# Altium PCB PCB1.PcbDoc
Units mm, origin at the board's own origin, x right, y up, seen from the top; angles counter-clockwise.
Board outline 80 x 100 mm, 2 copper layers (Top Layer, Bottom Layer), stack 1.534 mm thick; 74 components, 57 nets, 283 pads, 92 vias.
Unrouted connection lines stored in the file: 1.
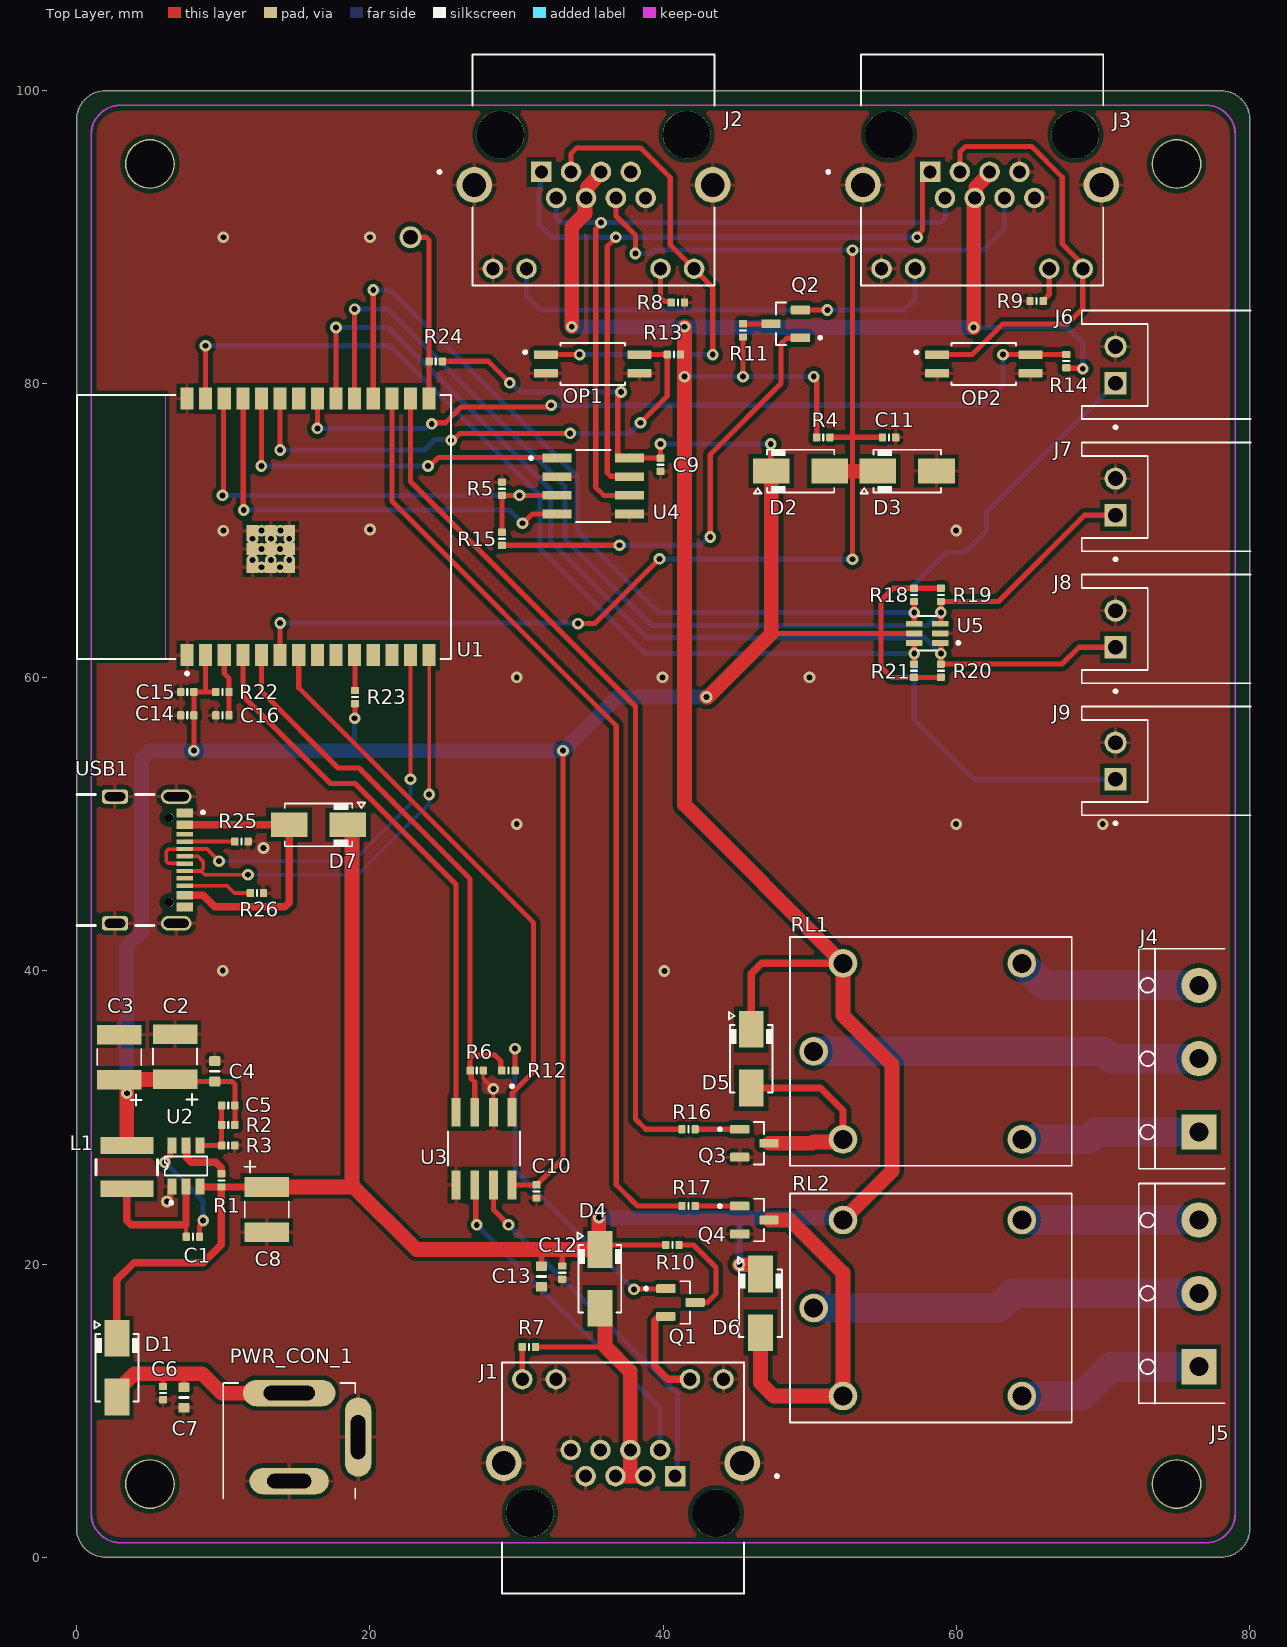
[diagram p0: Top Layer view]
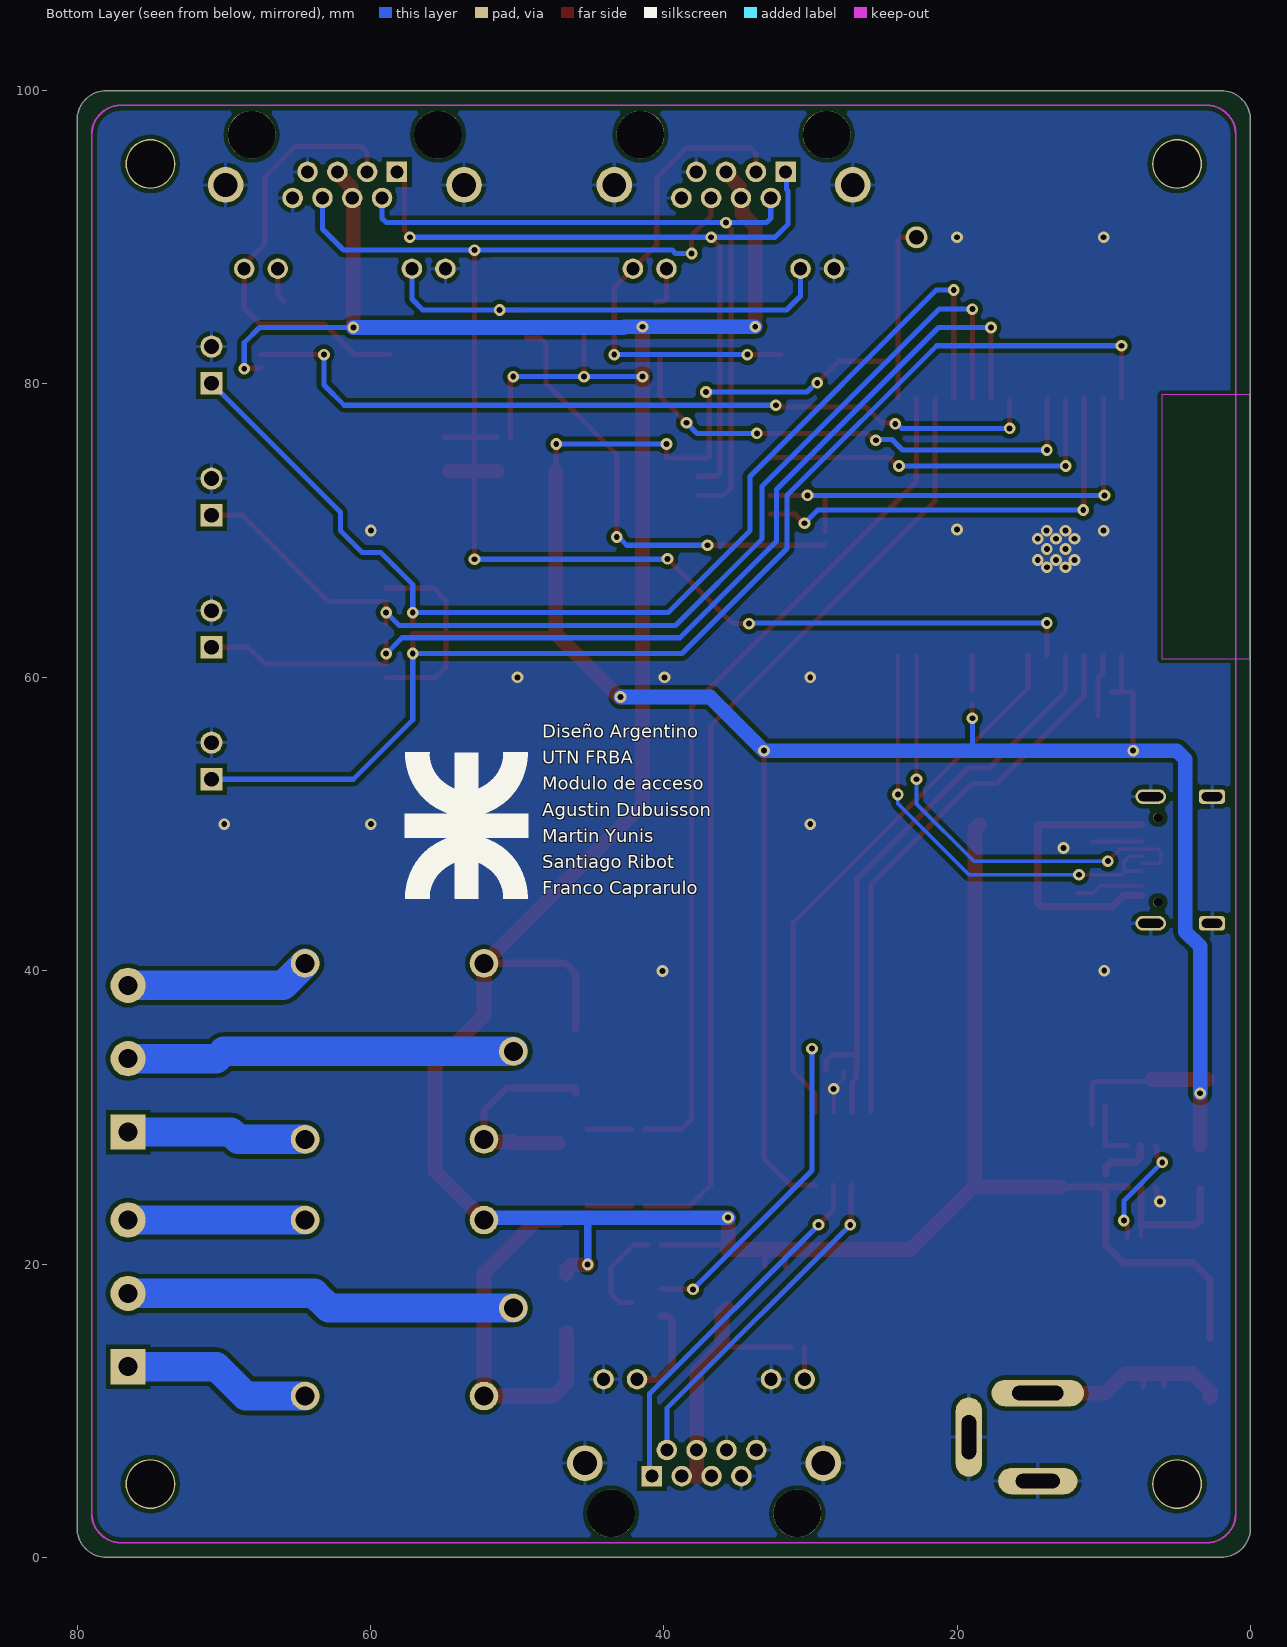
[diagram p1: Bottom Layer view, seen from below]
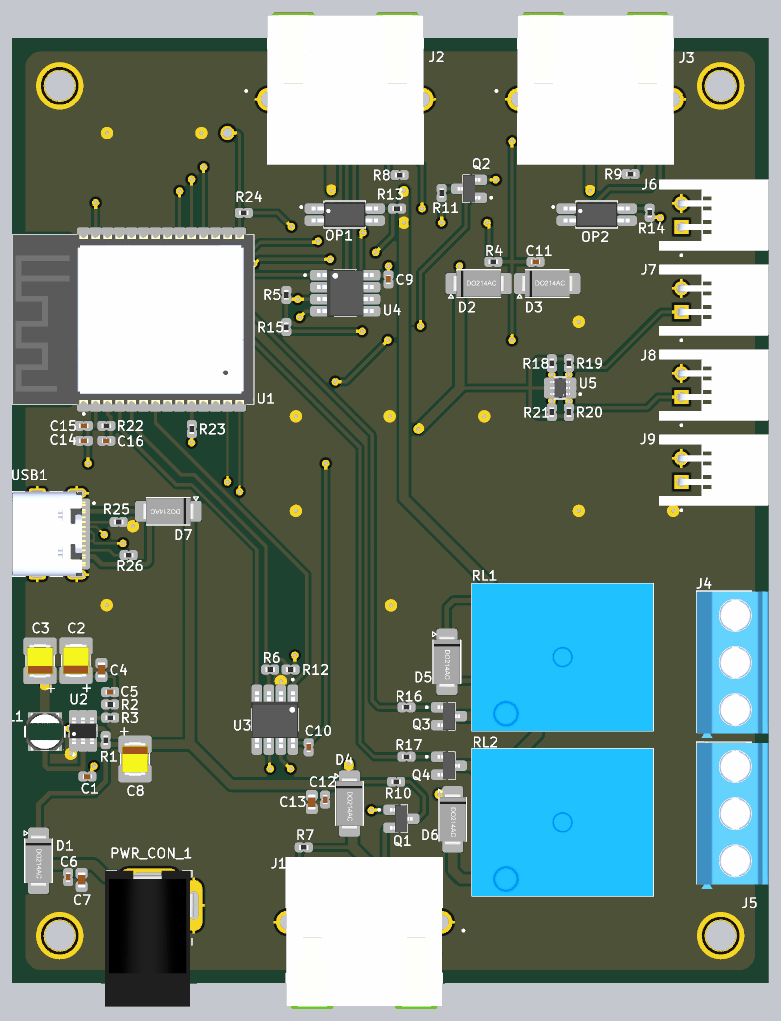
[diagram p2: 3D render of the assembled board from above, using the file's embedded part models]

## Layer stack, top to bottom
Top Solder: solder mask 0.0127, Solder Resist, Dk 3.3
Top Layer: signal copper 0.0178
Dielectric1: core 1.4986, FR-4, Dk 4.3
Bottom Layer: signal copper 0.0178
Bottom Solder: solder mask 0.0127, Solder Resist, Dk 3.3

## Board outline
0,2 0,98 cw(c2,98) 2,100 78,100 cw(c78,98) 80,98 80,2 cw(c78,2) 78,0 2,0 cw(c2,2)

## Design rules (kind name [scope] priority, off if disabled: settings)
Clearance [All] p1: gap=0.3 ignorepadtopadclearanceinfootprint=FALSE
DiffPairsRouting [All] p1: maxlimit=0.254 minlimit=0.254 mostfreqgap=0.254 toplayer_minwidth=0.254 toplayer_maxwidth=0.254 toplayer_prefwidth=0.254 bottomlayer_minwidth=0.254 bottomlayer_maxwidth=0.254 bottomlayer_prefwidth=0.254 maxuncoupledlength=12.7
HoleSize [All] p1: absolutevalues=TRUE maxlimit=7.62 minlimit=0.254 maxpercent=80.000 minpercent=20.000
MinimumAnnularRing [All] p1: minimumring=0.254
PasteMaskExpansion [All] p1: expansion=0.254
PlaneClearance [All] p1: clearance=0.381
PlaneConnect [All] p1: pad.planeconnectstyle=Relief pad.reliefexpansion=0.508 pad.reliefentries=4 pad.reliefconductorwidth=0.254 pad.reliefairgap=0.254 via.planeconnectstyle=Direct via.reliefexpansion=0.508 via.reliefentries=4 via.reliefconductorwidth=0.254 via.reliefairgap=0.254
PolygonConnect Polygon_GND [All] p1: thpad.connectstyle=Relief thpad.reliefconductorwidth=0.254 thpad.reliefentries=4 thpad.polygonreliefangle="90 Angle" thpad.airgapwidth=0.3 smdpad.connectstyle=Relief smdpad.reliefconductorwidth=0.254 smdpad.reliefentries=4 smdpad.polygonreliefangle="90 Angle" smdpad.airgapwidth=0.254 via.connectstyle=Direct via.reliefconductorwidth=0.254 via.reliefentries=4 via.polygonreliefangle="90 Angle" via.airgapwidth=0.254
PolygonConnect Polygon_GND_PWR [All] p2: thpad.connectstyle=Relief thpad.reliefconductorwidth=0.254 thpad.reliefentries=4 thpad.polygonreliefangle="90 Angle" thpad.airgapwidth=0.254 smdpad.connectstyle=Relief smdpad.reliefconductorwidth=0.254 smdpad.reliefentries=4 smdpad.polygonreliefangle="90 Angle" smdpad.airgapwidth=0.254 via.connectstyle=Direct via.reliefconductorwidth=0.254 via.reliefentries=4 via.polygonreliefangle="90 Angle" via.airgapwidth=0.254
PolygonConnect Polygon_PWR [All] p3: thpad.connectstyle=Relief thpad.reliefconductorwidth=0.254 thpad.reliefentries=4 thpad.polygonreliefangle="90 Angle" thpad.airgapwidth=0.254 smdpad.connectstyle=Relief smdpad.reliefconductorwidth=0.254 smdpad.reliefentries=4 smdpad.polygonreliefangle="90 Angle" smdpad.airgapwidth=0.254 via.connectstyle=Direct via.reliefconductorwidth=0.254 via.reliefentries=4 via.polygonreliefangle="90 Angle" via.airgapwidth=0.254
RoutingVias [All] p1: holewidth=0.254 width=0.508 viastyle="Through Hole" minholewidth=0.254 minwidth=0.508 maxholewidth=0.254 maxwidth=0.508
SMDNeckDown [All] p1: percent=100.000
SilkToSolderMaskClearance SilkscreenOverComponentPads [IsPad] p1: minsilkscreentomaskgap=0.254 clearancetoexposedcopper=TRUE
SolderMaskExpansion [All] p1: expansion=0.254 istentingtop=FALSE
SupplyNets "Schematic Supply Nets_5" [InNet('VBus')] p1: voltage=0.000
SupplyNets "Schematic Supply Nets_4" [InNet('BUS_PWR_IN')] p2: voltage=0.000
SupplyNets "Schematic Supply Nets_3" [InNet('GND')] p3: voltage=0.000
SupplyNets "Schematic Supply Nets_2" [InNet('+3.3V')] p4: voltage=0.000
SupplyNets "Schematic Supply Nets_1" [InNet('+12V')] p5: voltage=0.000
SupplyNets "Schematic Supply Nets" [InNet('PWR_IN')] p6: voltage=0.000
Width [All] p1: maxlimit=5 minlimit=0.254 preferedwidth=0.35 minimp=50.000000 maximp=50.000000 favimp=50.000000
24 further rules are at their usual default settings.

## Classes and differential pairs
component class MdA_RS485: C9 C10 C11 C12 C13 D2 D3 D4 J1 J2 J3 OP1 OP2 Q1 Q2 R4 R5 R6 R7 R8 R9 R10 R11 R12 R13 R14 R15 U3 U4
component class MdA_Power: C1 C2 C3 C4 C5 C6 C7 C8 D1 L1 PWR_CON_1 R1 R2 R3 U2
component class MdA_Perifericos: D5 D6 J4 J5 J6 J7 J8 J9 Q3 Q4 R16 R17 R18 R19 R20 R21 RL1 RL2 U5
component class MdA_CPU: C14 C15 C16 D7 R22 R23 R24 R25 R26 U1 USB1

## Components (designator, comment, footprint, x,y, rotation, side; value= is the part's Value field where it differs from the comment)
C1 "CAP" C_0402 7.932,21.86 r90 top
C2 "CAP_P" C_P_1210 6.72,34.133 r90 top
C3 "CAP_P" C_P_1210 2.916,34.1 r90 top
C4 "CAP" C_0603 9.421,33.142 r180 top
C5 "CAP" C_0402 10.346,30.798 r90 top
C6 "CAP" C_0402 5.9,11.2 r180 top
C7 "CAP" C_0603 7.317,10.9 r180 top
C8 "CAP_P" C_P_1210 12.971,23.71 r270 top
C9 "CAP" C_0402 39.817,74.497 r180 top
C10 "CAP" C_0402 31.367,24.948 r180 top
C11 "CAP" C_0402 55.395,76.365 r270 top
C12 "CAP" C_0402 33.114,19.412 r180 top
C13 "CAP" C_0603 31.692,19.148 r180 top
C14 "CAP" C_0402 7.55,57.412 r90 top
C15 "CAP" C_0402 7.55,59 r90 top
C16 "CAP" C_0402 9.946,57.412 r90 top
D1 "SS14" D_SMA#1 2.8,12.941 r0 top
D2 "SS14" D_SMA#1 49.355,74.105 r90 top
D3 "SS14" D_SMA#1 56.617,74.105 r90 top
D4 "SS14" D_SMA#1 35.726,19 r0 top
D5 "SS14" D_SMA#1 46.047,34.008 r0 top
D6 "SS14" D_SMA#1 46.673,17.331 r0 top
D7 "SS14" D_SMA#2 16.5,49.947 r0 top
J1 "RJ45-8-Pin-2-LED" RJ45-8-Pin-2-Led 37.123,2.365 r0 top locked
J2 "RJ45-8-Pin-2-LED" RJ45-8-Pin-2-Led 35.372,97.635 r180 top locked
J3 "RJ45-8-Pin-2-LED" RJ45-8-Pin-2-Led 61.872,97.635 r180 top locked
J4 "CONN_3P" BORNERA_3P_P_5mm 76.524,34.01 r0 top locked
J5 "CONN_3P" BORNERA_3P_P_5mm 76.524,18.01 r0 top locked
J6 "JST_S2B_XH-A" JST_S2B-XH-A 75.9,81.3 r90 top locked
J7 "JST_S2B_XH-A" JST_S2B-XH-A 75.9,72.3 r90 top locked
J8 "JST_S2B_XH-A" JST_S2B-XH-A 75.9,63.3 r90 top locked
J9 "JST_S2B_XH-A" JST_S2B-XH-A 75.9,54.3 r90 top locked
L1 "IND" IFSC1515AH 3.371,26.661 r180 top
OP1 "TCMT1100" SSOP4 35.185,81.238 r0 top
OP2 "TCMT1100" SSOP4 61.862,81.238 r0 top
PWR_CON_1 "CN_PowerJack" PJ002B 14.5,5.2 r0 top locked
Q1 "BC817" SOT-23-3 41.175,17.379 r0 top
Q2 "BC817" SOT-23-3 48.35,84.1 r180 top
Q3 "BC817" SOT-23-3 46.215,28.237 r0 top
Q4 "BC817" SOT-23-3 46.215,23 r0 top
R1 "RES" R_0402 9.871,25.7 r180 top
R2 "RES" R_0402 10.346,29.486 r270 top
R3 "RES" R_0402 10.346,28.082 r90 top
R4 "RES" R_0402 50.913,76.365 r270 top
R5 "RES" R_0402 29,72.857 r0 top
R6 "RES" R_0402 27.288,33.185 r270 top
R7 "RES" R_0402 30.842,14.348 r270 top
R8 "RES" R_0402 41,85.55 r270 top
R9 "RES" R_0402 65.45,85.652 r90 top
R10 "RES" R_0402 40.625,21.3 r270 top
R11 "RES" R_0402 45.444,83.65 r0 top
R12 "RES" R_0402 29.45,33.185 r90 top
R13 "RES" R_0402 40.725,82 r90 top
R14 "RES" R_0402 67.477,81.56 r0 top
R15 "RES" R_0402 29,69.45 r0 top
R16 "RES" R_0402 41.725,29.187 r270 top
R17 "RES" R_0402 41.725,23.95 r270 top
R18 "RES" R_0402 57.11,65.621 r180 top
R19 "RES" R_0402 58.925,65.621 r180 top
R20 "RES" R_0402 58.925,60.45 r0 top
R21 "RES" R_0402 57.11,60.45 r0 top
R22 "RES" R_0402 9.946,59 r270 top
R23 "RES" R_0402 18.988,58.653 r180 top
R24 "RES" R_0402 24.49,81.547 r270 top
R25 "RES" R_0402 11.246,48.804 r90 top
R26 "RES" R_0402 12.3,45.295 r90 top
RL1 "SRD-24VDC-SL-C" RELAY_SRD-24VDC-SL-C 58,34.119 r0 top locked
RL2 "SRD-24VDC-SL-C" RELAY_SRD-24VDC-SL-C 58,16.619 r0 top locked
U1 "ESP32-C6-WROOM-1" ESP32-C6-WROOM-1 12.79,70.128 r90 top
U2 "TPS563200" SOT-23-6 7.377,26.684 r0 top
U3 "ISL3172EIBZ" SOIC-8 27.657,27.873 r270 top
U4 "ISL3172EIBZ" SOIC-8 35.233,72.915 r0 top
U5 "NUP4202" SOT-363 58,62.999 r180 top
USB1 "USB-Type-C-16-pins" GCT_USB4105GFA120 2.7,47.7 r270 top locked

## Footprints (in the part's own frame and the unit in brackets; to place one, negate y for a bottom-side part, rotate by r counter-clockwise, add the part's x,y. Pads: shape width x height; smd on the part's side, far side on the other; paste and mask are expansions set on the pad)
BORNERA_3P_P_5mm [mm]
  rect 2.4x2.4 hole 1.3: 1(-0.002,-5.01)
  round 2.4 hole 1.3: 2(-0.002,-0.01) 3(-0.002,4.99)
  silkscreen extent -4.1,-7.51 1.75,7.49, body extent -4.08,-8.09 3.52,7.41, height 10
C_0402 [mm]
  rrect25% 0.55x0.5 smd: 1(0,-0.45) 2(0,0.45)
  silkscreen extent -0.2,0 0.2,0, body extent -0.25,-0.5 0.25,0.5, height 0.6
C_0603 [mm]
  rrect25% 0.76x0.66 smd: 1(0,-0.7) 2(0,0.7)
  silkscreen extent -0.3,0 0.3,0, body extent -0.4,-0.8 0.4,0.8, height 0.95
C_P_1210 [mm]
  rect 1.34x3.02 smd: 1(-1.54,0) 2(1.54,0)
  silkscreen extent -3.3,-1.52 0.55,1.5, body extent -1.75,-1.4 1.75,1.4, height 2.1
D_SMA#1 [mm]
  rect 1.7x2.5 smd: 1(-0.047,-2.008) 2(-0.047,1.992)
  silkscreen extent -1.57,-2.31 1.48,3.17, body extent -1.44,-2.75 1.35,2.74, height 2.39
D_SMA#2 [mm]
  rect 2.5x1.7 smd: 1(-2,0) 2(2,0)
  silkscreen extent -2.3,-1.52 3.17,1.52, body extent -2.74,-1.4 2.74,1.4, height 2.39
ESP32-C6-WROOM-1 [mm]
  rect 1.5x0.9 smd: 1(-8.623,5.26) 2(-8.623,3.99) 3(-8.623,2.72) 4(-8.623,1.45) 5(-8.623,0.18) 6(-8.623,-1.09) 7(-8.623,-2.36) 8(-8.623,-3.63) 9(-8.623,-4.9) 10(-8.623,-6.17) 11(-8.623,-7.44) 12(-8.623,-8.71) 13(-8.623,-9.98) 14(-8.623,-11.25) 15(8.877,-11.25) 16(8.877,-9.98) 17(8.877,-8.71) 18(8.877,-7.44) 19(8.877,-6.17) 20(8.877,-4.9) 21(8.877,-3.63) 22(8.877,-2.36) 23(8.877,-1.09) 24(8.877,0.18) 25(8.877,1.45) 26(8.877,2.72) 27(8.877,3.99) 28(8.877,5.26)
  rect 0.8x0.8 smd: 29_1(-2.628,0.79) 29_2(-1.378,0.79) 29_3(-0.128,0.79) 29_4(-2.628,-0.46) 29_5(-1.378,-0.46) 29_6(-0.128,-0.46) 29_7(-2.628,-1.71) 29_8(-1.378,-1.71) 29_9(-0.128,-1.71)
  Keep-Out Layer region: 9.127,6.75 -8.873,6.75 -8.873,12.75 9.127,12.75
  silkscreen extent -9.97,-12.75 9.13,12.75, body extent -8.87,-12.75 9.13,12.75, height 3.25
GCT_USB4105GFA120 [mm]
  rect 0.6x1.15 smd: A1_B12(-3.047,4.676) A4_B9(-2.247,4.676) B1_A12(3.353,4.676) B4_A9(2.553,4.676)
  rect 0.3x1.15 smd: A5(-1.097,4.676) A6(-0.097,4.676) A7(0.403,4.676) A8(1.403,4.676) B5(1.903,4.676) B6(0.903,4.676) B7(-0.597,4.676) B8(-1.597,4.676)
  oval 1x2.1 hole 0.6 slot 1.7 at 90 deg: SH1(-4.167,4.101) SH2(4.473,4.101)
  rrect50% 1x1.8 hole 0.6 slot 1.4 at 90 deg: SH3(-4.167,-0.079) SH4(4.473,-0.079)
  round 0.65 hole 0.65 unplated: ""(-2.737,3.601) ""(3.043,3.601)
  silkscreen extent -4.32,-2.68 4.62,6.02, body extent -4.32,-2.68 4.62,5.03, height 3.31
IFSC1515AH [mm]
  rect 3.6x1.15 smd paste+0 mask+0: 1(-0.061,1.529) 2(-0.061,-1.421)
  silkscreen extent -2.16,-0.47 2.04,0.58, body extent -2.06,-1.95 1.94,2.05, height 1.9
JST_S2B-XH-A [mm]
  rect 1.508x1.508 / inner round 1.508 / far side rect 1.508x1.508 hole 1: 1(-1.25,5.065)
  round 1.508 hole 1: 2(1.25,5.065)
  silkscreen extent -4.35,-4.14 3.7,7.36, body extent -3.7,-4.14 3.7,7.36, height 6.1
PJ002B [mm]
  oval 6.3x1.8 hole 1 slot 3.5 at 0 deg: 1(0,6)
  oval 5.4x1.8 hole 1 slot 3 at 0 deg: 2(0,0)
  oval 1.8x5.4 hole 1 slot 3 at 90 deg: 3(4.7,3)
  silkscreen extent -4.5,-1.2 4.5,6.7, body extent -4.7,-7.7 4.7,6.7, height 11.05
R_0402 [mm]
  rrect25% 0.55x0.5 smd: 1(0,-0.45) 2(0,0.45)
  silkscreen extent -0.2,0 0.2,0, body extent -0.25,-0.5 0.25,0.5, height 0.3
RELAY_SRD-24VDC-SL-C [mm]
  round 1.95 hole 1.3: COIL1(-5.746,6.381) COIL2(-5.746,-5.619) COM(-7.746,0.381) NC(6.454,6.381) NO(6.454,-5.619)
  silkscreen extent -9.35,-7.42 9.85,8.18, body extent -9.35,-7.42 9.85,8.18, height 15.8
RJ45-8-Pin-2-Led [mm]
  rect 1.398x1.398 / inner round 1.398 / far side rect 1.398x1.398 hole 0.89: 1(3.683,3.175)
  round 1.398 hole 0.89: 2(2.667,4.953) 3(1.651,3.175) 4(0.635,4.953) 5(-0.381,3.175) 6(-1.397,4.953) 7(-2.413,3.175) 8(-3.429,4.953) 9(6.985,9.779) 10(4.699,9.779) 11(-4.445,9.779) 12(-6.731,9.779)
  round 2.43 hole 1.62: SH1(-8.001,4.064) SH2(8.255,4.064)
  round 3.25 hole 3.25 unplated: ""(-6.223,0.635) ""(6.477,0.635)
  silkscreen extent -8.13,-4.82 10.73,10.92, body extent -8.13,-5.13 8.38,10.92, height 15.5
SOIC-8 [mm]
  rect 1.97x0.6 smd: 1(-2.475,2.032) 2(-2.475,0.762) 3(-2.475,-0.508) 4(-2.475,-1.778) 5(2.475,-1.778) 6(2.475,-0.508) 7(2.475,0.762) 8(2.475,2.032)
  silkscreen extent -4.35,-2.32 1.17,2.58, body extent -3,-2.32 3,2.58, height 1.75
SOT-23-3 [mm]
  rrect25% 1.32x0.6 smd: 1(-1,0.95) 2(-1,-0.95) 3(1,0)
  silkscreen extent -2.45,-1.45 0.65,1.45, body extent -1.2,-1.45 1.2,1.45, height 1.2
SOT-23-6 [mm]
  rect 0.6x1.1 smd: 1(-0.867,-1.402) 2(0.083,-1.402) 3(1.033,-1.402) 4(1.033,1.398) 5(0.083,1.398) 6(-0.867,1.398)
  silkscreen extent -1.37,-2.6 1.53,0.65, body extent -1.37,-1.4 1.53,1.4, height 1.45
SOT-363 [mm]
  rrect25% 1.15x0.4 smd: 1(-0.89,0.65) 2(-0.89,0) 3(-0.89,-0.65) 4(0.89,-0.65) 5(0.89,0) 6(0.89,0.65)
  silkscreen extent -2.22,-1.17 0.63,1.17, body extent -1.05,-1 1.05,1, height 1.1
SSOP4 [mm]
  rrect25% 1.64x0.59 smd: 1(-3.185,0.762) 2(-3.185,-0.508) 3(3.185,-0.508) 4(3.185,0.762)
  silkscreen extent -4.7,-1.3 2.2,1.56, body extent -3.5,-1.17 3.5,1.43, height 2.1

## Part data
D1 D2 D3 D4 D5 D6: library part DIODE_SH
D7: library part DIODO_SH, "Diode Shottky"
U3 U4: "Transceiver Half RS422, RS485 8-SOIC"

## Free pads (board coordinates)
  round 3.4 hole 3.2 mask+0.8: 9(5,5) 9(5,95) 9(75,5) 9(75,95)
  round 1.5 hole 1: 10(22.77,90)

## Via types
v1: diameter 0.8, hole 0.4, Top Layer to Bottom Layer, 92 vias

## Nets (pads, with @x,y where several pads share a name; then routed paths per layer and width w, separated by ;. In a path a pad name is that pad's centre, name@x,y a point inside that pad or via, vN(x,y) a via of type N, cw(c..) or ccw(c..) an arc to the next point about the centre after c; other vN are vias at no path point)
+3.3V: C2.1 C3.1 C4.2 C5.1 C9.1 C10.1 C14.1 C15.1 D2.2 L1.2 R2.2 R18.1 R19.1 R20.1 R21.1 R22.1 R23.2 R24.2 U1.2 U3.8 U4.8 U5.5 | length 193.4
  Top Layer w0.35: C2.1 6.871,32.442 C4.2 10.591,32.442 10.796,32.237 C5.1 R2.2 ; v1(8,55) C14.1 C15.1 8.748,59 ; U1.2 8.8,59.052 8.748,59 ; R22.1 8.748,59 ; v1(18.96,57.212) 18.974,57.226 18.974,58.189 R23.2 ; R24.2 28.073,81.547 v1@29.54,80.08 ; U3.8 C10.1 31.392,25.398 31.467,25.473 31.467,25.498 33.167,27.198 v1(33.167,55) ; v1(37.114,79.457) 36.898,79.241 36.898,75.072 37.023,74.947 U4.8 C9.1 v1(39.817,75.915) ; v1(47.334,75.915) 47.334,74.087 D2.2 ; 47.363,62.966 47.396,62.999 54.845,62.999 ; 47.363,66.1 47.392,66.071 ; U5.5 54.845,62.999 ; R20.1 R21.1 55.57,60 54.845,60.725 54.845,62.999 ; R19.1 R18.1 55.67,66.071 54.845,65.246 54.845,62.999
  Top Layer w1: C3.1 2.933,32.577 6.704,32.577 C2.1 ; C3.1@3.262,32.56 3.432,32.39 v1(3.432,31.642) L1.2 ; v1(42.943,58.653) 43.05,58.653 47.396,62.999 ; 47.363,62.966 47.363,66.1 D2.2
  Bottom Layer w0.35: 18.96,55 v1(18.96,57.212) ; v1(29.538,80.077) 29.606,80.077 30.226,79.457 v1(37.114,79.457) ; v1(39.817,75.915) v1(47.334,75.915)
  Bottom Layer w1: v1(3.432,31.642) 3.432,41.653 4.44,42.662 4.44,54.414 5.026,55 v1(8,55) 18.96,55 v1(33.167,55) 36.82,58.653 v1(42.943,58.653)
+12V: C8.1 C12.1 C13.1 D1.2 D4.2 D5.2 D6.2 D7.2 J2.4 J2.5 J3.4 J3.5 R1.2 R4.1 R10.1 R11.1 R13.1 R14.1 RL1.COIL1 RL2.COIL1 U2.3 | length 255.7
  Top Layer w0.35: C13.1 31.692,20.992 ; C12.1 33.114,20.992 ; D4.2 35.987,21.3 R10.1 ; v1(45.444,80.5) R11.1 ; v1(50.26,80.5) 50.26,80.378 50.463,80.175 R4.1 ; R14.1 67.514,81.073 68.565,81.073 v1(68.603,81.035)
  Top Layer w0.5: D1.2 2.753,18.92 3.916,20.083 8.63,20.083 9.871,21.323 R1.2 ; U2.3 8.443,25.25 R1.2 ; C8.1 R1.2 ; D5.2 46,39.8 46.7,40.5 RL1.COIL1
  Top Layer w1: C8.1 18.915,25.25 ; D7.2 18.783,49.664 18.783,25.382 18.915,25.25 ; v1(33.763,83.901) 33.763,90.707 34.661,91.605 34.661,92.606 J2.4 34.813,92.758 34.813,93.412 35.753,94.352 J2.5 ; v1(35.614,23.16) 35.614,21.057 D4.2 33.114,20.992 31.692,20.992 23.173,20.992 18.915,25.25 ; v1(41.45,83.901) v1(41.45,80.5) 41.45,51.304 RL1.COIL1 52.254,36.946 55.6,33.6 55.6,26.346 RL2.COIL1 ; v1(45.19,19.962) 46.276,19.962 46.626,19.612 D6.2 ; v1(61.162,83.85) 61.162,92.607 J3.4 61.313,92.758 61.313,93.412 62.253,94.352 J3.5
  Bottom Layer w0.35: v1(41.45,80.5) v1(45.444,80.5) v1(50.26,80.5) ; v1(61.162,83.85) 67.56,83.85 68.603,82.807 v1(68.603,81.035)
  Bottom Layer w0.5: v1(45.19,19.962) 45.19,23.16
  Bottom Layer w1: v1(33.763,83.901) v1(41.45,83.901) 42.699,83.901 42.749,83.85 v1(61.162,83.85) ; v1(35.614,23.16) 45.19,23.16 52.094,23.16 RL2.COIL1
AM_RS485_A: J2.1 J3.1 U4.7 | length 52.6
  Top Layer w0.35: v1(36.769,90) 36.769,89.982 36.183,89.397 36.183,73.927 36.403,73.707 37.678,73.707 U4.7 ; v1(57.31,90) 57.31,90.122 57.665,90.477 57.665,93.936 J3.1
  Bottom Layer w0.35: J2.1 31.63,94.401 31.63,93.267 31.531,93.168 31.531,90.883 32.414,90 v1(57.31,90)
AM_RS485_B: J2.2 J3.2 U4.6 | length 50.3
  Top Layer w0.35: v1(35.753,91) 35.753,90.923 35.4,90.57 35.4,72.951 35.944,72.407 U4.6
  Bottom Layer w0.35: J2.2 32.705,91.28 32.985,91 v1(35.753,91) 58.925,91 59.205,91.28 J3.2
AM_RX: U1.24 U4.1 | length 25
  Top Layer w0.35: v1(12.6,74.4) 12.605,74.405 12.605,78.97 U1.24@12.61,78.975 ; v1(23.965,74.4) 24.079,74.4 24.676,74.997 32.708,74.997 U4.1
  Bottom Layer w0.35: v1(12.6,74.4) v1(23.965,74.4)
AM_TX: U1.25 U4.4 | length 29.6
  Top Layer w0.35: U1.25 11.37,78.975 11.37,71.43 v1(11.4,71.4) ; v1(30.4,70.5) 30.434,70.5 31.071,71.137 U4.4
  Bottom Layer w0.35: v1(11.4,71.4) 29.5,71.4 v1(30.4,70.5)
AM_TX_EN: R5.1 R15.2 U1.26 U4.3 | length 34.3
  Top Layer w0.35: v1(9.946,72.407) 10.008,72.469 10.008,78.943 U1.26 ; R15.2 29,72.332 29.075,72.407 v1(30.2,72.407) ; R5.1 v1(30.2,72.407) ; U4.3 v1(30.2,72.407)
  Bottom Layer w0.35: v1(9.946,72.407) v1(30.2,72.407)
BUS_PWR_IN: D4.1 J1.3 J1.4 J1.5 R7.2 | length 19.1
  Top Layer w0.35: R7.2 35.978,14.348 36.029,14.399
  Top Layer w1: D4.1 36.029,16.642 36.029,14.399 37.758,12.67 J1.4 37.758,5.54 ; J1.5 37.758,5.54 ; J1.3 37.758,5.54
CC1: R25.2 USB1.A5 | length 3.4
  Top Layer w0.254: USB1.A5 7.379,48.801 10.792,48.801 R25.2
CC2: R26.2 USB1.B5 | length 4.7
  Top Layer w0.254: USB1.B5 10.256,45.797 10.758,45.295 R26.2
CM_RS485_A: J1.1 U3.7 | length 25.1
  Top Layer w0.35: U3.7 28.419,23.701 v1(29.45,22.669)
  Bottom Layer w0.35: v1(29.45,22.669) 40.964,11.155 40.964,5.698 J1.1
CM_RS485_B: J1.2 U3.6 | length 23.3
  Top Layer w0.35: U3.6 27.218,25.328 27.218,22.739 v1(27.288,22.669)
  Bottom Layer w0.35: v1(27.288,22.669) 39.79,10.167 J1.2
CM_RX: U1.7 U3.1 | length 38.4
  Top Layer w0.35: U1.7 15.15,59.285 31.167,43.268 31.167,33.117 29.703,31.653 29.703,30.362 U3.1
CM_TX: U1.4 U3.4 | length 38.2
  Top Layer w0.35: U1.4 11.34,58.731 17.312,52.759 18.988,52.759 25.879,45.868 U3.4
CM_TX_EN: R6.1 R12.2 U1.5 U3.3 | length 41.1
  Top Layer w0.35: U1.5 12.61,59.045 17.828,53.827 19.263,53.827 26.838,46.252 26.838,34.049 ; U3.3 27.149,32.39 26.913,32.626 26.913,33.11 R6.1 26.838,34.049 ; R12.2 28.925,33.26 28.925,33.849 28.52,34.254 27.043,34.254 26.838,34.049
Connect: C11.1 D2.1 D3.2 J2.6 J3.6 R4.2 U1.6 | length 103.2
  Top Layer w0.35: U1.6 v1(13.88,63.7) ; v1(34.187,63.661) 35.323,63.661 v1(39.741,68.078) ; J2.6 36.782,92.669 36.782,91.458 38.1,90.14 v1(38.1,88.9) ; R4.2 52.9,76.365 ; v1(52.898,68.05) 52.898,71.344 52.9,71.346 52.9,74.058 52.9,76.365 ; v1(52.9,89.125) 52.9,76.365 ; C11.1 52.9,76.365
  Top Layer w1: D2.1 52.9,74.058 D3.2
  Bottom Layer w0.35: v1(13.88,63.7) v1@34.187,63.7 ; v1(38.1,88.9) 39.201,88.9 39.426,89.125 51.798,89.125 51.8,89.123 52.898,89.123 v1(52.9,89.125) 61.825,89.125 63.269,90.569 J3.6 ; v1@39.763,68.05 v1(52.898,68.05)
EN: C16.1 R22.2 U1.3 | length 4.2
  Top Layer w0.35: U1.3 10.07,60.255 10.396,59.929 R22.2 C16.1
GND: C2.2 C3.2 C4.1 C6.2 C7.2 C8.2 C9.2 C10.2 C11.2 C12.2 C13.2 C14.2 C15.2 C16.2 D3.1 J1.6 J1.7 J1.8 J1.9 J1.11 J1.SH1 J1.SH2 J2.7 J2.8 J2.9 J2.SH1 J2.SH2 J3.7 J3.8 J3.9 J3.SH1 J3.SH2 J6.2 J7.2 J8.2 J9.2 OP1.2 OP1.3 OP2.2 OP2.3 PWR_CON_1.2 PWR_CON_1.3 Q3.2 Q4.2 R3.1 R5.2 R6.2 R8.2 R9.2 R25.1 R26.1 U1.1 U1.28 U1.29_1 U1.29_2 U1.29_3 U1.29_4 U1.29_5 U1.29_6 U1.29_7 U1.29_8 U1.29_9 U2.1 U3.2 U3.5 U4.2 U4.5 U5.2 USB1.A1_B12 USB1.B1_A12 USB1.SH1 USB1.SH2 USB1.SH3 USB1.SH4 | length 4.3
  Top Layer w0.254: R6.2 27.738,32.623 v1(28.419,31.942) U3.2
  Top Layer w0.35: v1(6.175,24.26) 6.175,24.382 6.386,24.593 6.386,25.157 U2.1
  other v1: 40.078,39.978 9.971,40 12.75,48.363 30.011,49.989 59.969,49.989 69.969,49.989 30.011,60 39.944,60 49.969,60 12.61,67.5 13.88,67.5 12,68 13.25,68 14.5,68 12.61,68.75 13.88,68.75 12,69.45 13.263,69.45 14.5,69.45 10.008,70 12.61,70 13.894,70 59.969,70.009 20.008,70.076 10.008,90 20.008,90
LED_AM_TX_EN: J2.10 J3.10 Q2.2 | length 33
  Top Layer w0.35: Q2.2 v1(51.188,85.05)
  Bottom Layer w0.35: J2.10 30.673,86.007 31.63,85.05 v1(51.188,85.05) 56.435,85.05 57.173,85.788 J3.10
LED_CM_TX_EN: J1.10 Q1.2 | length 6.7
  Top Layer w0.5: Q1.2 39.722,16.429 39.429,16.136 39.429,13.032 40.316,12.144 J1.10
NetC1_1: C1.1 U2.6 | length 7.6
  Top Layer w0.35: v1(6.011,26.932) 6.011,26.987 6.386,27.362 6.386,27.957 U2.6 ; C1.1 8.382,22.592 8.63,22.84 v1(8.63,22.962)
  Bottom Layer w0.35: v1(6.011,26.932) 8.63,24.312 v1(8.63,22.962)
NetC1_2: C1.2 L1.1 U2.2 | length 9.8
  Top Layer w0.254: 7.461,22.669 7.461,21.881 C1.2
  Top Layer w0.5: L1.1 3.432,22.962 3.725,22.669 7.461,22.669 U2.2
NetC5_2: C5.2 R2.1 R3.2 U2.4 | length 4.2
  Top Layer w0.35: U2.4 R3.2 C5.2
NetD5_1: D5.1 Q3.3 RL1.COIL2 | length 14.4
  Top Layer w0.5: D5.1@46,31.6 D5.1 50.721,32 52.254,30.467 RL1.COIL2
  Top Layer w1: Q3.3 50.159,28.237 50.24,28.318 52.072,28.318 RL1.COIL2
NetD6_1: D6.1 Q4.3 RL2.COIL2 | length 24.4
  Top Layer w1: D6.1 46.626,11.898 47.524,11 RL2.COIL2 52.254,19.4 48.654,23 Q4.3
NetJ1_12: J1.12 R7.1 | length 2.2
  Top Layer w0.35: J1.12 R7.1
NetJ2_11: J2.11 R8.1 | length 2.8
  Top Layer w0.35: J2.11 39.817,85.883 40.085,85.615 40.485,85.615 R8.1
NetJ3_11: J3.11 R9.1 | length 2.4
  Top Layer w0.35: R9.1 65.9,85.677 66.317,86.094 J3.11
NetJ4_1: J4.1 RL1.NO | length 12.3
  Bottom Layer w2: RL1.NO 69,28.5 69.5,29 J4.1
NetJ4_2: J4.2 RL1.COM | length 26.5
  Bottom Layer w2: RL1.COM 70,34.5 70.5,34 J4.2
NetJ4_3: J4.3 RL1.NC | length 12.7
  Bottom Layer w2: RL1.NC 65.954,39 J4.3
NetJ5_1: J5.1 RL2.NO | length 12.9
  Bottom Layer w2: RL2.NO 68.5,11 70.5,13 J5.1
NetJ5_2: J5.2 RL2.COM | length 26.7
  Bottom Layer w2: RL2.COM 62.834,17 63.834,18 J5.2
NetJ5_3: J5.3 RL2.NC | length 12.1
  Bottom Layer w2: RL2.NC J5.3
NetQ1_1: Q1.1 R12.1 | length 23.5
  Top Layer w0.35: R12.1 v1(29.9,34.683) ; v1(38,18.273) 38.028,18.301 40.147,18.301 Q1.1
  Bottom Layer w0.35: v1(29.9,34.683) 29.9,26.373 v1(38,18.273)
NetQ1_3: Q1.3 R10.2 | length 6.6
  Top Layer w0.35: R10.2 42.072,21.3 43.6,19.772 43.6,17.979 43,17.379 Q1.3
NetQ2_1: Q2.1 R15.1 | length 31.1
  Top Layer w0.35: R15.1 v1(37.023,69) ; v1(43.208,69.567) 43.208,75.2 48.035,80.027 48.035,82.73 48.423,83.118 49.318,83.118 Q2.1
  Bottom Layer w0.35: v1(37.023,69) 42.519,69 43.086,69.567 v1(43.208,69.567)
NetQ2_3: Q2.3 R11.2 | length 1.9
  Top Layer w0.35: R11.2 Q2.3
NetQ3_1: Q3.1 R16.2 | length 3
  Top Layer w0.35: R16.2 Q3.1
NetQ4_1: Q4.1 R17.2 | length 3
  Top Layer w0.35: R17.2 Q4.1
NetR1_1: R1.1 U2.5 | length 3.9
  Top Layer w0.5: U2.5 7.511,28.032 7.511,27.225 7.804,26.932 9.492,26.932 9.871,26.553 R1.1
NetR23_1: R23.1 U1.10 | length 2.4
  Top Layer w0.35: U1.10 18.974,61.491 18.974,59.117 R23.1
NetR24_1: pad.10 R24.1 U1.15 | length 12.1
  Top Layer w0.35: pad.10 23.835,90 24.04,89.795 R24.1 U1.15
PWR_IN: C6.1 C7.1 D1.1 PWR_CON_1.1 | length 15
  Top Layer w0.35: C6.1 5.9,12.528 ; 7.234,12.528 7.317,12.445 C7.1
  Top Layer w1: D1.1 2.753,11.333 3.948,12.528 5.9,12.528 7.234,12.528 8.567,12.528 9.896,11.2 PWR_CON_1.1
Rele_1: R16.1 U1.16 | length 58.9
  Top Layer w0.35: U1.16 22.77,73.347 38.1,58.017 38.1,29.887 38.8,29.187 R16.1
Rele_2: R17.1 U1.17 | length 65
  Top Layer w0.35: U1.17 21.5,72 36.8,56.7 36.8,25.4 38.25,23.95 R17.1
Sensor_1: J6.1 R18.2 U1.18 U5.4 | length 79.1
  Top Layer w0.35: U1.18 v1(20.23,86.4) ; U5.4 v1(57.11,64.41) R18.2
  Bottom Layer w0.35: v1(20.23,86.4) 21.42,86.4 34.123,73.697 34.123,70 39.713,64.41 v1(57.11,64.41) 57.11,66.325 59.301,68.516 60.556,68.516 62.049,70.009 62.049,71.264 J6.1
Sensor_2: J7.1 R19.2 U1.19 U5.3 | length 73.4
  Top Layer w0.35: U1.19 v1(18.96,85.1) ; U5.3 58.9,63.649 58.925,63.674 v1(58.925,64.422) R19.2 62.848,65.171 68.727,71.05 J7.1
  Bottom Layer w0.35: v1(18.96,85.1) 21.242,85.1 33.292,73.05 33.292,69.442 39.198,63.535 58.037,63.535 v1(58.925,64.422)
Sensor_3: J8.1 R20.2 U1.20 U5.1 | length 71.2
  Top Layer w0.35: U1.20 v1(17.69,83.85) ; U5.1@58.9,62.349 58.925,62.324 v1(58.925,61.612) R20.2 67.186,60.9 68.336,62.05 J8.1
  Bottom Layer w0.35: v1(17.69,83.85) 21.275,83.85 32.317,72.808 32.317,69.272 38.889,62.7 57.837,62.7 v1(58.925,61.612)
Sensor_4: J9.1 R21.2 U1.27 U5.6 | length 84.1
  Top Layer w0.35: U1.27 v1(8.8,82.61) ; R21.2 v1(57.11,61.624) U5.6
  Bottom Layer w0.35: v1(8.8,82.61) 21.387,82.61 31.59,72.407 31.59,68.79 38.756,61.624 v1(57.11,61.624) 57.11,57.11 61.17,53.05 J9.1
Tamper_1: OP1.4 R13.2 U1.23 | length 36.2
  Top Layer w0.35: v1(13.88,75.492) U1.23 ; v1(25.54,76.165) 25.662,76.165 26.128,76.632 v1(33.652,76.632) ; OP1.4 R13.2 40.275,79.176 v1(38.454,77.355)
  Bottom Layer w0.35: v1@13.909,75.492 23.715,75.492 24.44,76.217 25.488,76.217 v1(25.54,76.165) ; v1(33.652,76.632) 37.731,76.632 v1(38.454,77.355)
Tamper_1_12V: J2.3 J2.12 OP1.1 | length 33.7
  Top Layer w0.35: OP1.1 v1(34.3,82) ; J2.3 33.721,95.721 34.1,96.1 38.454,96.1 40.475,94.079 40.475,89.484 43.373,86.586 v1(43.373,82)
  Bottom Layer w0.35: v1(34.3,82) v1(43.373,82)
Tamper_2: OP2.4 R14.2 U1.21 | length 56.4
  Top Layer w0.35: v1(16.42,76.975) U1.21 ; v1(24.215,77.279) 24.291,77.355 25.14,77.355 26.207,78.422 v1@32.414,78.422 ; v1(63.167,82) OP2.4 65.296,82 65.301,82.005 67.472,82.005 R14.2
  Bottom Layer w0.35: v1(16.42,76.975) 23.788,76.975 24.093,77.279 v1(24.215,77.279) ; v1(32.356,78.551) 61.783,78.551 63.167,79.935 v1(63.167,82)
Tamper_2_12V: J3.3 J3.12 OP2.1 | length 30.1
  Top Layer w0.35: OP2.1 61.067,82 63.167,84.1 67.565,84.1 68.603,85.138 J3.12 68.603,88.14 67.202,89.541 67.202,94.099 65.101,96.2 60.6,96.2 60.221,95.821 J3.3
"USB Data +": U1.14 USB1.A6 USB1.B6 | length 31
  Top Layer w0.254: USB1.B6 8.482,46.797 ; USB1.A6 8.286,47.797 8.63,47.453 8.63,46.946 8.482,46.797 ; v1(11.696,46.542) 8.736,46.542 8.482,46.797 ; v1(24.04,52.017) U1.14
  Bottom Layer w0.254: v1(11.696,46.542) 19.188,46.542 24.04,51.394 v1(24.04,52.017)
"USB Data -": U1.13 USB1.A7 USB1.B7 | length 30.8
  Top Layer w0.254: USB1.A7@7.376,47.32 6.269,47.32 6.12,47.469 6.12,48.125 6.269,48.274 7.376,48.274 USB1.B7@7.399,48.297 ; USB1.B7 USB1.B7@7.399,48.297 ; v1(9.721,47.469) 9.715,47.469 8.887,48.297 USB1.B7@7.399,48.297 ; v1(22.77,53.048) U1.13
  Bottom Layer w0.254: v1(9.721,47.469) 18.869,47.469 22.77,51.37 v1(22.77,53.048)
VBus: D7.1 USB1.A4_B9 USB1.B4_A9 | length 20
  Top Layer w0.5: USB1.B4_A9 8.634,45.147 9.434,44.347 14.207,44.347 14.5,44.64 D7.1 USB1.A4_B9
pads on no net: J1. J2. J3. U1.8 U1.9 U1.11 U1.12 U1.22 USB1. USB1.A8 USB1.B8

## Polygon pours and split planes (outlines as drawn)
no net on Board "NONET_L-01_P-001" (solid): 18,12.941 17.025,12.941 17,12.916
GND on Top Layer "NONET_L-01_P-001" (solid, remove dead copper, pour order 0): 0.029,100 -35,100 -35,0 80.022,0 80.022,99.978 80,100
GND on Bottom Layer "NONET_L-01_P-001" (solid, remove dead copper, pour order 1): 33.106,100.079 -1.923,100.079 -1.923,0.079 113.098,0.079 113.098,100.057 113.077,100.079

## Keep-outs
Keep-Out Layer:
  lines w0.127: 1,3 ccw(c3,3) 3,1 77,1 ccw(c77,3) 79,3 79,97 ccw(c77,97) 77,99 3,99 ccw(c3,97) 1,97 1,3

## Silkscreen, mask and mechanical layers (free items; w line width, h text height)
Bottom Overlay:
  region: 4738 vertices and 0 holes, not listed, extent 49.232,44.887 57.663,54.887
  text "Diseño Argentino" at 48.27,55.571 h1.52
  text "UTN FRBA" at 48.27,53.795 h1.52
  text "Modulo de acceso" at 48.27,52.014 h1.52
  text "Agustin Dubuisson" at 48.27,50.237 h1.52
  text "Martin Yunis" at 48.27,48.459 h1.52
  text "Santiago Ribot" at 48.27,46.681 h1.52
  text "Franco Caprarulo" at 48.27,44.903 h1.52
Board:
  the board outline again, w0.127

## Text inside footprints (layer, text, board x,y; h text height)
J6: Top Assembly "PCB Edge" at 79.738,85.467 h1 r90
J7: Top Assembly "PCB Edge" at 79.738,76.467 h1 r90
J8: Top Assembly "PCB Edge" at 79.738,67.467 h1 r90
J9: Top Assembly "PCB Edge" at 79.738,58.467 h1 r90
USB1: Top Assembly "PCB EDGE" at 0.121,42.147 h1 r270